# Altium PCB 功放.PcbDoc
Units mm, origin at the board's own origin, x right, y up, seen from the top; angles counter-clockwise.
Board outline 152.4 x 101.6 mm, 2 copper layers (Top Layer, Bottom Layer); 40 components, 15 nets, 96 pads, 117 vias.
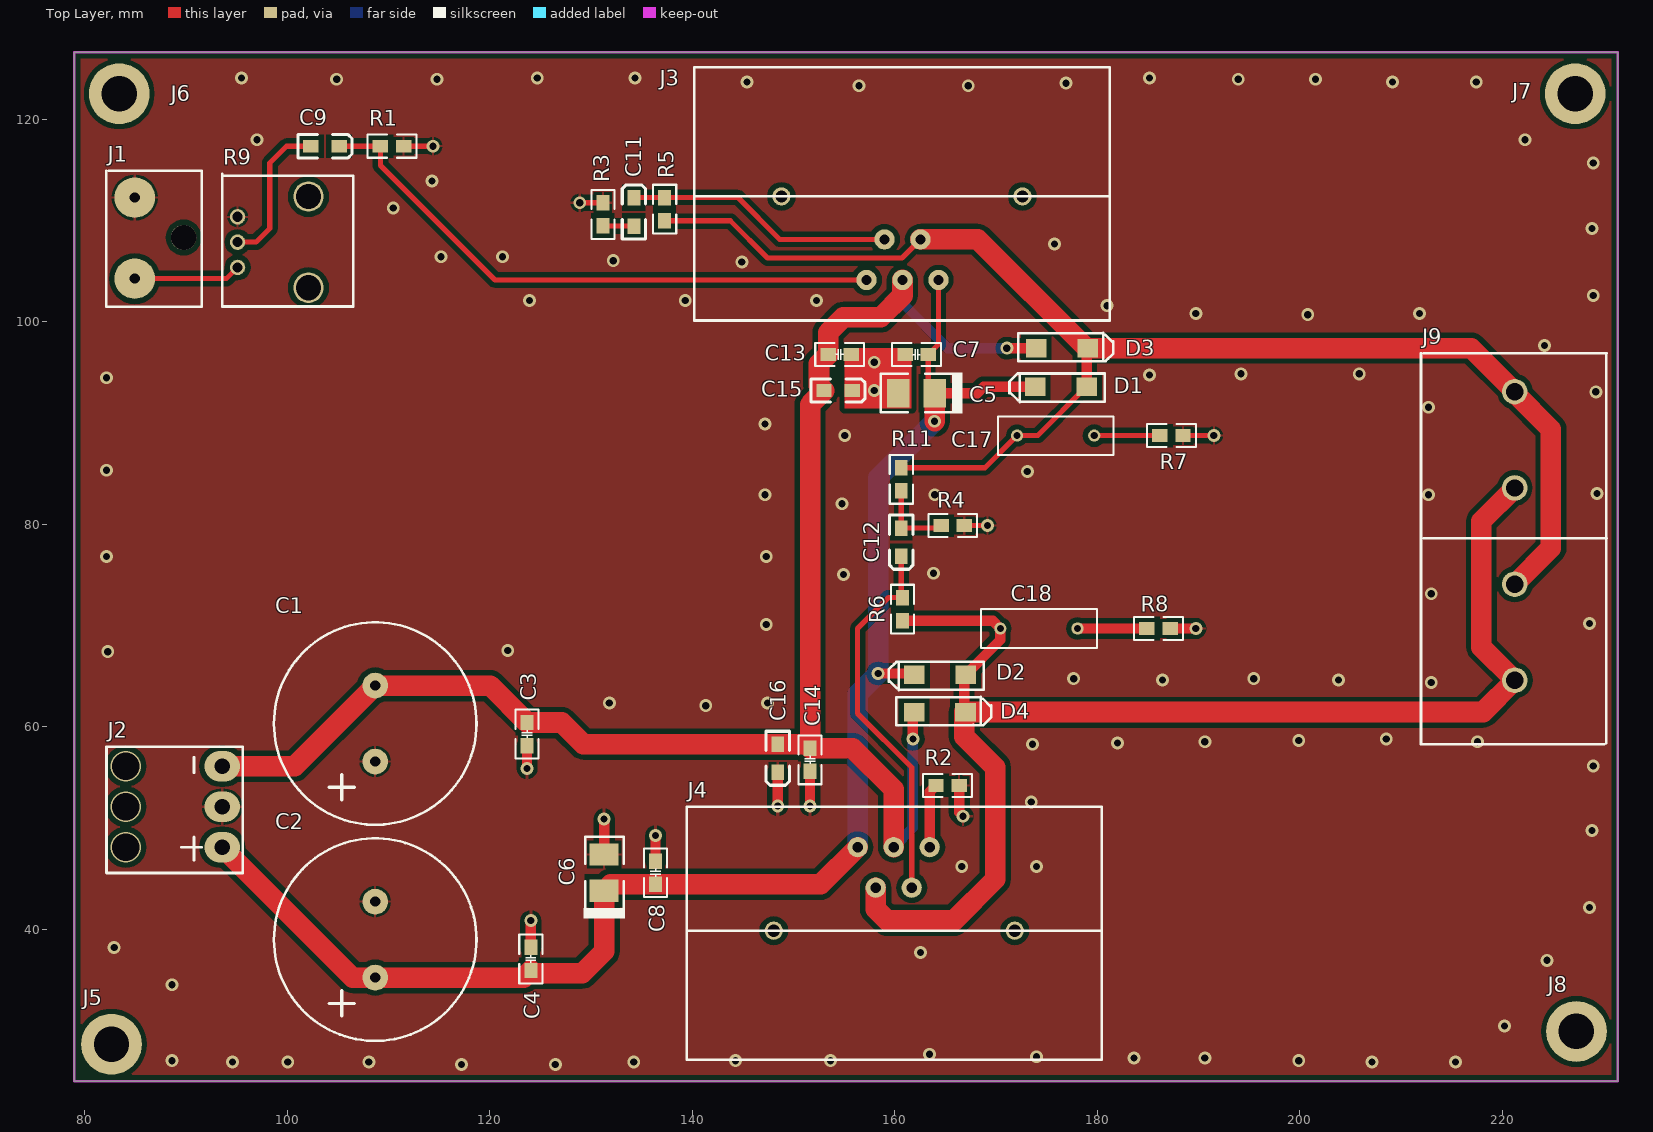
[diagram p0: Top Layer view]
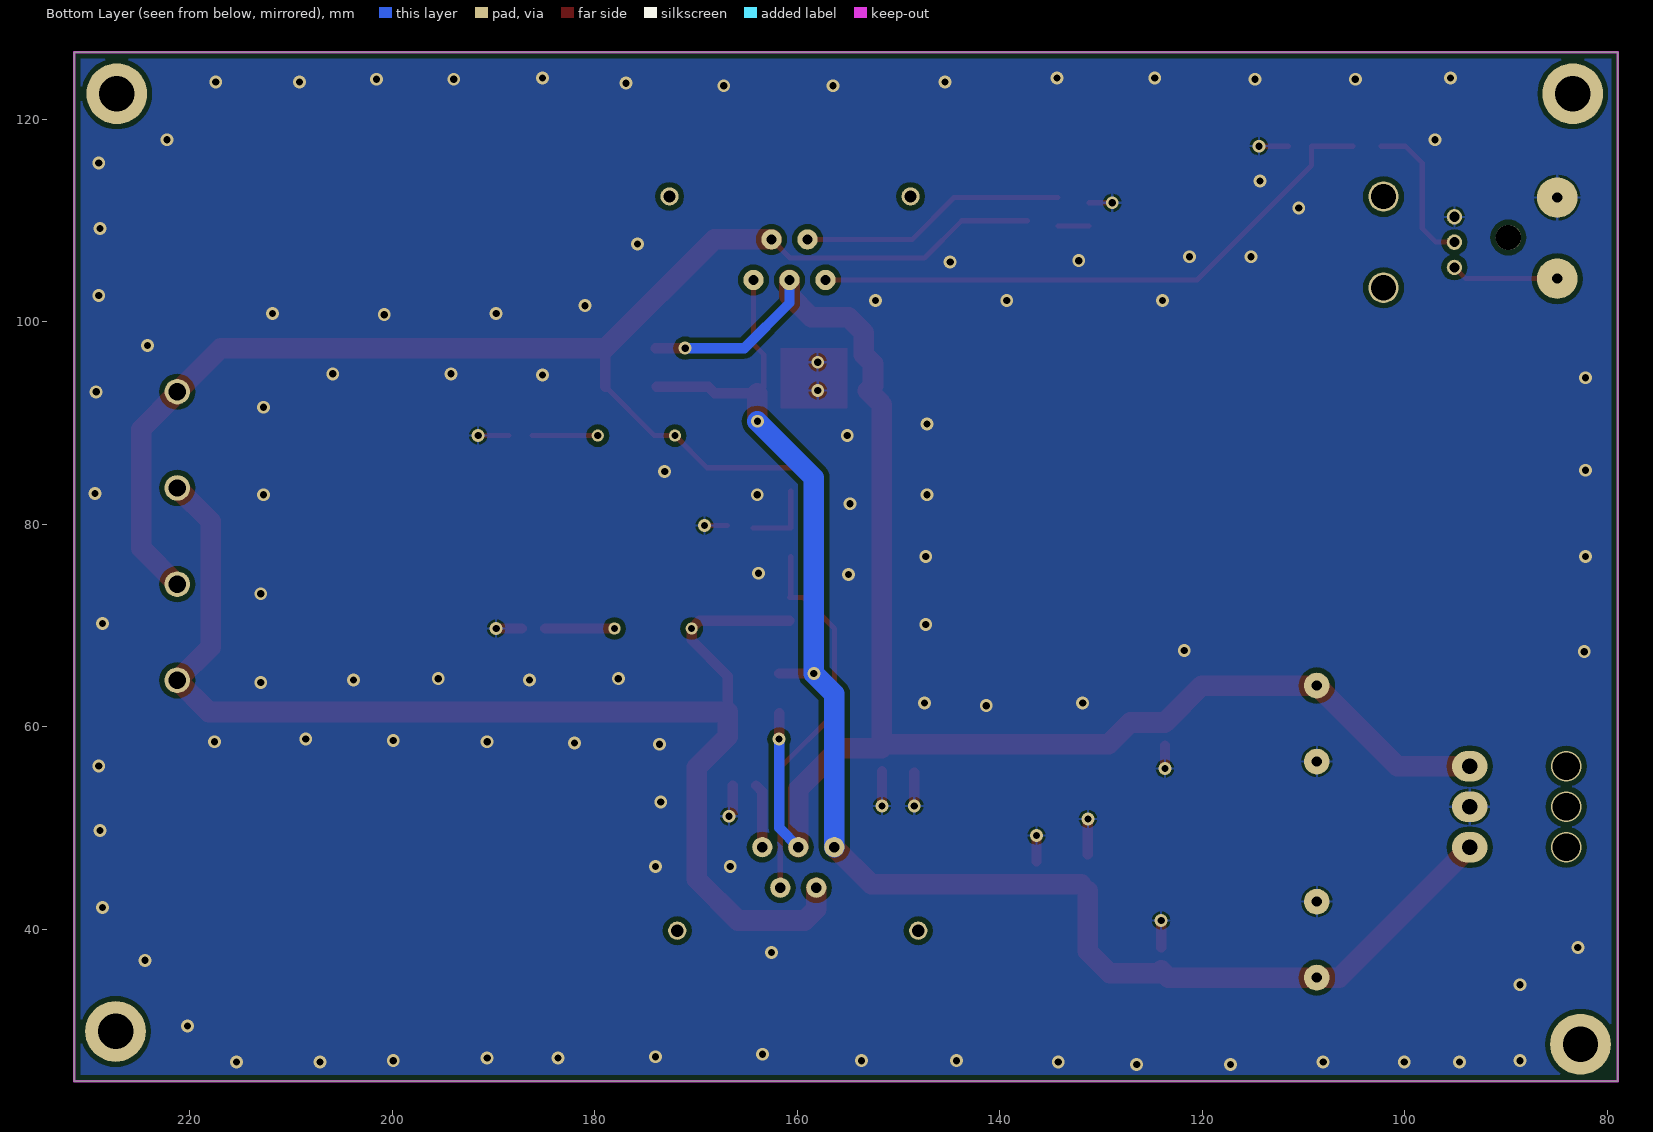
[diagram p1: Bottom Layer view, seen from below]

## Layer stack, top to bottom
Top Layer: signal copper 0.0356
Dielectric: dielectric 0.32, FR-4, Dk 4.8
Bottom Layer: signal copper 0.0356

## Board outline
78.994,25.019 231.394,25.019 231.394,126.619 78.994,126.619

## Design rules (kind name [scope] priority, off if disabled: settings)
Clearance [All] p1: gap=0.508
HoleSize [All] p1: absolutevalues=TRUE maxlimit=25.4 minlimit=0.025 maxpercent=80.000 minpercent=20.000
PolygonConnect [All] p1: connectstyle=Relief reliefconductorwidth=0.254 reliefentries=4 polygonreliefangle="90 Angle"
RoutingVias [All] p1: holewidth=0.711 width=1.27 viastyle="Through Hole" minholewidth=0.711 minwidth=1.27 maxholewidth=0.711 maxwidth=1.27
SilkscreenOverComponentPads [IsPad] p1: minsilkscreentomaskgap=0
SolderMaskExpansion [All] p1: expansion=0.102
Width [All] p1: maxlimit=12.7 minlimit=0.025 preferedwidth=2.286 minimp=50.000000 maximp=50.000000 favimp=50.000000
26 further rules are at their usual default settings.

## Components (designator, comment, footprint, x,y, rotation, side; value= is the part's Value field where it differs from the comment)
C1 "CAP-E" 4700U/35V 108.712,60.325 r270 top
C2 "CAP-E" 4700U/35V 108.712,38.989 r270 top
C3 "CAP-0.1UF" 0805C 123.698,58.166 r90 top
C4 "CAP-0.1UF" 0805C 124.079,38.227 r270 top
C5 "CAP-E" 3528C 163.957,92.964 r0 top
C6 "CAP-E" 3528C 131.318,43.815 r270 top
C7 "CAP-0.1UF" 0805C 161.036,96.774 r0 top
C8 "CAP-0.1UF" 0805C 136.398,46.736 r270 top
C9 "CAP-T" C3216 105.156,117.348 r0 top
C11 "CAP-T" C3216 134.239,112.268 r90 top
C12 "CAP-T" C3216 160.655,76.835 r270 top
C13 "CAP-0.1UF" 0805C 155.702,96.774 r180 top
C14 "CAP-0.1UF" 0805C 151.638,55.626 r90 top
C15 "CAP-T" C3216 155.829,93.218 r0 top
C16 "CAP-T" C3216 148.463,55.499 r270 top
C17 "Cap" RAD-0.3 175.895,88.773 r180 top
C18 "Cap" RAD-0.3 174.244,69.723 r180 top
D1 "D-1N4007" M7 178.943,93.599 r180 top
D2 "D-1N4007" M7 167.005,65.151 r180 top
D3 "D-1N4007" M7 173.99,97.409 r0 top
D4 "D-1N4007" M7 161.925,61.468 r0 top
J1 "CON2" VOICE-1 84.963,104.267 r90 top
J2 "CON3" POWER-1 92.837,48.133 r90 top
J3 "TDA2030" TDA2030 181.229,112.395 r0 top
J4 "TDA2030" TDA2030 139.446,39.878 r180 top
J5 "CON1" GDK 83.439,28.448 r0 top
J6 "CON1" GDK 84.201,122.301 r0 top
J7 "CON1" GDK 227.965,122.301 r0 top
J8 "CON1" GDK 228.092,29.718 r0 top
J9 "CON4" HB-95-4 221.234,93.091 r270 top
R1 "Res2" 0805R 111.506,117.348 r180 top
R2 "Res2" 0805R 166.37,54.229 r180 top
R3 "Res2" 0805R 131.191,111.76 r270 top
R4 "Res2" 0805R 166.878,79.883 r180 top
R5 "Res2" 0805R 137.287,109.982 r90 top
R6 "Res2" 0805R 160.782,70.485 r90 top
R7 "Res2" 0805R 188.468,88.773 r180 top
R8 "Res2" 0805R 187.198,69.723 r180 top
R9 "R-GLIDE" RV09-5 95.123,110.363 r270 top
R11 "Res2" 0805R 160.655,85.598 r270 top

## Footprints (in the part's own frame and the unit in brackets; to place one, negate y for a bottom-side part, rotate by r counter-clockwise, add the part's x,y. Pads: shape width x height; smd on the part's side, far side on the other; paste and mask are expansions set on the pad)
0805C [mil]
  rect 60x50 smd: 1(-0.48,-0.25) 2(89.52,-0.25)
  silkscreen extent -50,-45 140,45
0805R [mil]
  rect 60x50 smd: 1(0,0) 2(90,0)
  silkscreen extent -50,-45 140,45
3528C [mm]
  rect 2.2x2.85 smd: 1(-0.012,-0.006) 2(-3.594,-0.006)
  silkscreen extent -5.35,-2.02 2.73,2.05
4700U/35V [mm]
  round 2.54 hole 1: 1(3.738,-0.006) 2(-3.762,-0.006)
  silkscreen extent -10.01,-10.01 9.98,9.99
C3216 [mil]
  rect 60x50 smd: 1(-0.48,-0.25) 2(-110.48,-0.25)
  silkscreen extent -160,-45 50,45
GDK [mm]
  round 6 hole 3.5: 1(-0.774,0.222)
HB-95-4 [mm]
  round 2.5 hole 1.7: 1(-0.012,-0.006)
  round 2.524 hole 1.7: 2(9.488,-0.006) 3(18.988,-0.006) 4(28.488,-0.006)
  silkscreen extent -3.82,-9.26 34.79,9.07
M7 [mil]
  rect 80x71 smd: 1(-0.48,-0.25) 2(199.52,-0.25)
  silkscreen extent -70,-51 300,60
POWER-1 [mm]
  oval 3x3.5 hole 1.5: 1(-0.012,-0.768) 2(3.988,-0.768) 3(7.988,-0.768)
  round 3 hole 2.7: 4(-0.012,8.764) 5(3.988,8.764) 6(7.988,8.764)
  silkscreen extent -2.55,-2.8 9.89,10.66
RAD-0.3 [mm] "Radial Cap, Thru-Hole; 2 Leads; 0.3 in Pin S"
  round 1.2 hole 0.7: 1(-3.81,0) 2(3.81,0)
  silkscreen extent -5.71,-1.91 5.71,1.9
RV09-5 [mm]
  round 1.524 hole 1: 1(4.988,-0.006) 2(-0.012,-0.006) 3(2.488,-0.006)
  round 3 hole 2.5: 4(-2.012,6.994) 5(6.988,6.994)
  silkscreen extent -4.24,-1.53 8.88,11.42
TDA2030 [mm]
  round 2 hole 1.016: 1(-24.012,-8.256) 2(-22.234,-4.256) 3(-20.456,-8.256) 4(-18.678,-4.256) 5(-16.9,-8.256)
  round 1.8 hole 1.2: 6(-32.412,-0.006) 7(-8.612,-0.006)
  silkscreen extent -41.01,-12.26 -0.01,12.74
VOICE-1 [mm]
  round 4 hole 1: 1(0,0) 2(8,0)
  round 2.5 hole 2.5: 3(4.064,-4.826)
  silkscreen extent -2.79,-6.6 10.67,2.79

## Part data
C1 C2 C5 C6: "µ"
C3 C4 C7 C8 C13 C14: "SMD-C"
C9 C11 C12 C15 C16: library part C
C17 C18: "Capacitor"
D1 D2 D3 D4: "Dio"
J1 J2 J5 J6 J7 J8 J9: "Connect"
J3 J4: library part TDA20
R1 R2 R3 R4 R5 R6 R7 R8 R11: "Resist"
R9: library part R-GLI

## Via types
v1: diameter 1.27, hole 0.711, Top Layer to Bottom Layer, 117 vias

## Nets (pads, with @x,y where several pads share a name; then routed paths per layer and width w, separated by ;. In a path a pad name is that pad's centre, name@x,y a point inside that pad or via, vN(x,y) a via of type N, cw(c..) or ccw(c..) an arc to the next point about the centre after c; other vN are vias at no path point)
+12: C2.1 C4.2 C5.1 C6.1 C7.2 C8.2 D1.2 D2.2 J2.1 J3.5 J4.5 | length 150.8
  Top Layer w0.254: C6.1 C6.1@131.947,44.462 ; D2.2@161.817,65.278 D2.2 ; C5.1@163.31,93.593 C5.1
  Top Layer w0.508: C5.1@163.31,93.593 C7.2 164.329,97.787 J3.5
  Top Layer w1.016: v1(158.369,65.278) D2.2@161.817,65.278 ; C5.1 168.142,92.958 168.789,93.605 D1.2
  Top Layer w2.032: J2.1 106.475,35.251 C2.1 123.371,35.251 C4.2 124.339,35.687 129.159,35.687 131.312,37.84 C6.1 ; C6.1@131.947,44.462 C8.2 152.674,44.462 J4.5 ; v1(163.945,90.182) C5.1
  Bottom Layer w2.032: J4.5 156.346,63.255 v1(158.369,65.278) 158.369,84.606 v1(163.945,90.182)
-12: C1.2 C3.2 C13.2 C14.2 C15.2 C16.2 D3.1 D4.1 J2.3 J3.3 J4.3 | length 163.6
  Top Layer w0.254: C14.2@151.239,58.305 C14.2 ; C15.2@152.527,93.707 C15.2 ; D4.1@161.798,61.36 161.906,61.468 D4.1
  Top Layer w1.016: v1(161.798,58.801) D4.1@161.798,61.36 ; v1(171.075,97.403) D3.1
  Top Layer w2.032: J2.3 100.739,56.121 C1.2 120.057,64.087 C3.2 127.139,60.44 129.274,58.305 C16.2 C14.2@151.239,58.305 ; C15.2@152.527,93.707 152.527,95.879 C13.2 153.428,98.945 154.94,100.457 158.623,100.457 160.773,102.607 J3.3 ; C15.2 151.644,91.833 C14.2 155.841,57.9 159.902,53.839 J4.3
  Bottom Layer w1.016: J4.3 161.798,50.03 v1(161.798,58.801) ; J3.3 160.773,101.863 165.233,97.403 v1(171.075,97.403)
GND: C1.1 C2.2 C3.1 C4.1 C5.2 C6.2 C7.1 C8.1 C13.1 C14.1 C15.1 C16.1 J1.2 J2.2 R1.1 R2.1 R3.1 R4.1 R7.1 R8.1 R9.2 | length 34.3
  Top Layer w0.254: v1(157.982,93.212) v1@158.236,92.958
  Top Layer w0.508: R1.1 v1(114.427,117.348) ; v1(128.905,111.76) R3.1 ; R4.1 v1(169.164,79.883) ; R7.1 v1(191.516,88.773)
  Top Layer w1.016: v1(123.704,55.886) C3.1 ; C4.1 v1(124.073,40.888) ; C6.2 v1(131.312,50.921) ; C8.1 v1(136.392,49.27) ; v1(148.457,52.203) C16.1 ; v1(151.644,52.203) C14.1 ; R2.1 166.37,51.562 v1(166.751,51.181) ; R8.1 v1(189.738,69.723)
  other v1: 117.221,26.67 126.492,26.67 94.615,26.924 100.076,26.924 108.077,26.924 134.239,26.924 207.137,26.924 215.392,26.924 88.646,27.051 144.272,27.051 153.67,27.051 199.898,27.051 183.642,27.305 190.627,27.305 173.99,27.432 163.449,27.686 220.218,30.48 88.646,34.544 224.409,36.957 162.56,37.719 82.931,38.227 228.6,42.164 166.624,46.228 173.99,46.228 228.854,49.784 173.482,52.578 228.981,56.134 173.609,58.293 181.991,58.42 190.627,58.547 217.551,58.547 199.898,58.674 208.534,58.801 141.351,62.103 131.826,62.357 147.447,62.357 212.979,64.389 186.436,64.643 203.835,64.643 177.673,64.77 195.453,64.77 82.296,67.437 121.793,67.564 147.32,70.104 228.6,70.231 212.979,73.152 154.94,75.057 163.83,75.184 82.169,76.835 147.32,76.835 154.813,82.042 147.193,82.931 163.957,82.931 212.725,82.931 229.362,83.058 173.101,85.217 82.169,85.344 155.067,88.773 147.193,89.916 212.725,91.567 229.235,93.091 82.169,94.488 185.166,94.742 194.183,94.869 205.867,94.869 157.988,96.012 224.155,97.663 200.787,100.711 189.738,100.838 211.836,100.838 180.975,101.6 123.952,102.108 139.319,102.108 152.273,102.108 228.981,102.616 144.907,105.918 132.207,106.045 115.189,106.426 121.285,106.426 175.768,107.696 228.854,109.22 110.49,111.252 114.3,113.919 228.981,115.697 97.028,117.983 222.25,117.983 156.464,123.317 167.259,123.317 176.911,123.571 145.415,123.698 209.169,123.698 217.424,123.698 104.902,123.952 114.808,123.952 193.929,123.952 201.549,123.952 95.504,124.079 124.714,124.079 134.366,124.079 185.166,124.079
NetC9_1: C9.1 J3.1 R1.2 | length 58.7
  Top Layer w0.508: C9.1 R1.2@109.214,117.342 ; R1.2 109.22,115.443 120.524,104.139 J3.1
NetC11_1: C11.1 J3.2 R5.2 | length 26.4
  Top Layer w0.508: C11.1@134.258,112.268 R5.2 144.526,112.268 148.655,108.139 J3.2
NetC11_2: C11.2 R3.2 | length 3
  Top Layer w0.508: R3.2 C11.2@134.233,109.474
NetC12_1: C12.1 J4.2 R6.2 | length 37.5
  Top Layer w0.508: R6.2@160.649,72.904 C12.1 ; R6.2 159.385,72.771 156.337,69.723 156.337,61.341 161.68,55.998 J4.2
NetC12_2: C12.2 R4.2 R11.2 | length 7.4
  Top Layer w0.508: R11.2 160.655,79.648 R4.2@164.357,79.648
NetC17_1: C17.1 R7.2 | length 6.5
  Top Layer w0.508: C17.1 R7.2
NetC18_1: C18.1 R8.2 | length 6.9
  Top Layer w1.016: C18.1 R8.2
NetJ4_1: J4.1 R2.2 | length 6.4
  Top Layer w1.016: J4.1 163.458,53.603 R2.2
VOICE: J1.1 R9.1 | length 10.6
  Top Layer w0.508: J1.1 94.008,104.267 R9.1
VOICE_R: C9.2 R9.3 | length 14.9
  Top Layer w0.508: R9.3 96.953,107.875 98.298,109.22 98.298,115.697 99.943,117.342 C9.2
VOUT1+: C17.2 D1.1 D3.2 J3.4 J9.1 J9.3 R5.1 R11.1 | length 139.7
  Top Layer w0.254: J9.1@221.228,92.97 J9.1
  Top Layer w0.508: R5.1 143.764,109.982 147.447,106.299 160.711,106.299 J3.4 ; R11.1 168.91,85.598 C17.2 174.123,88.773 D1.1
  Top Layer w1.016: D1.1 D3.2@178.955,97.3
  Top Layer w2.032: J3.4 168.213,108.139 D3.2@179.004,97.348 ; D3.2 216.928,97.403 J9.1 ; J9.3 224.79,77.666 224.79,89.408 J9.1@221.228,92.97
VOUT1-: C18.2 D2.1 D4.2 J4.4 J9.2 J9.4 R6.1 | length 130.9
  Top Layer w0.254: D4.2@166.866,61.499 D4.2@166.89,61.474
  Top Layer w1.016: R6.1 169.672,70.485 C18.2 170.434,68.586 166.866,65.018 D4.2@166.866,61.499
  Top Layer w2.032: J4.4 158.124,42.028 159.258,40.894 165.862,40.894 169.926,44.958 169.926,56.007 166.89,59.043 166.89,61.474 218.099,61.474 J9.4 217.932,67.899 217.932,80.308 J9.2
pads on no net: J1.3 J2.4 J2.5 J2.6 J3.6 J3.7 J4.6 J4.7 J5.1 J6.1 J7.1 J8.1 R9.4 R9.5

## Polygon pours and split planes (outlines as drawn)
GND on Bottom Layer "Top Layer-No Net" (solid, pour order 6): 78.994,126.619 231.394,126.619 231.394,25.019 78.994,25.019
GND on Top Layer "Top Layer-No Net" (solid, pour order 8): 78.994,126.619 231.394,126.619 231.394,25.019 78.994,25.019

## Keep-outs
Keep-Out Layer:
  the board outline again, w0.254

## Other copper
Top Layer:
  rectangle net GND: 155.067,91.44 161.671,97.409